# Altium PCB Plane_receiver_pcb.PcbDoc
Units mil, origin at the board's own origin, x right, y up, seen from the top; angles counter-clockwise.
Board outline 2083.66 x 3150.59 mil, 2 copper layers (Top Layer, Bottom Layer); 28 components, 28 nets, 95 pads, 0 vias.
Unrouted connection lines stored in the file: 1.
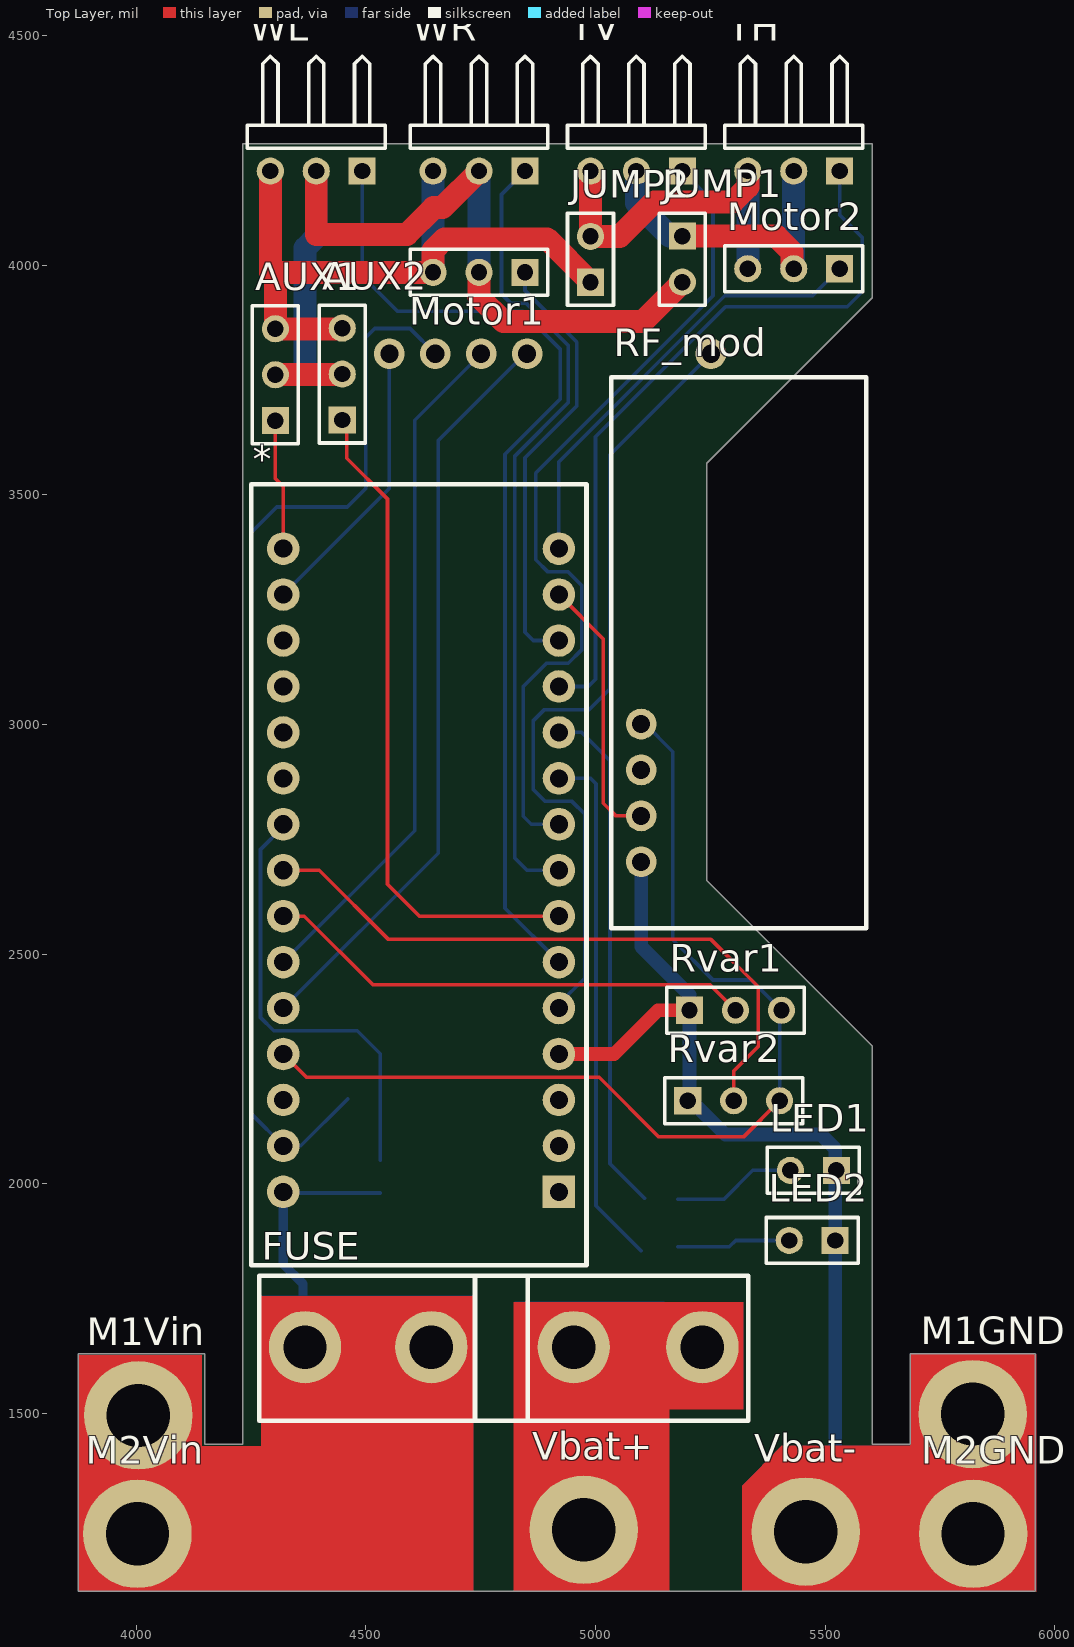
[diagram p0: Top Layer view]
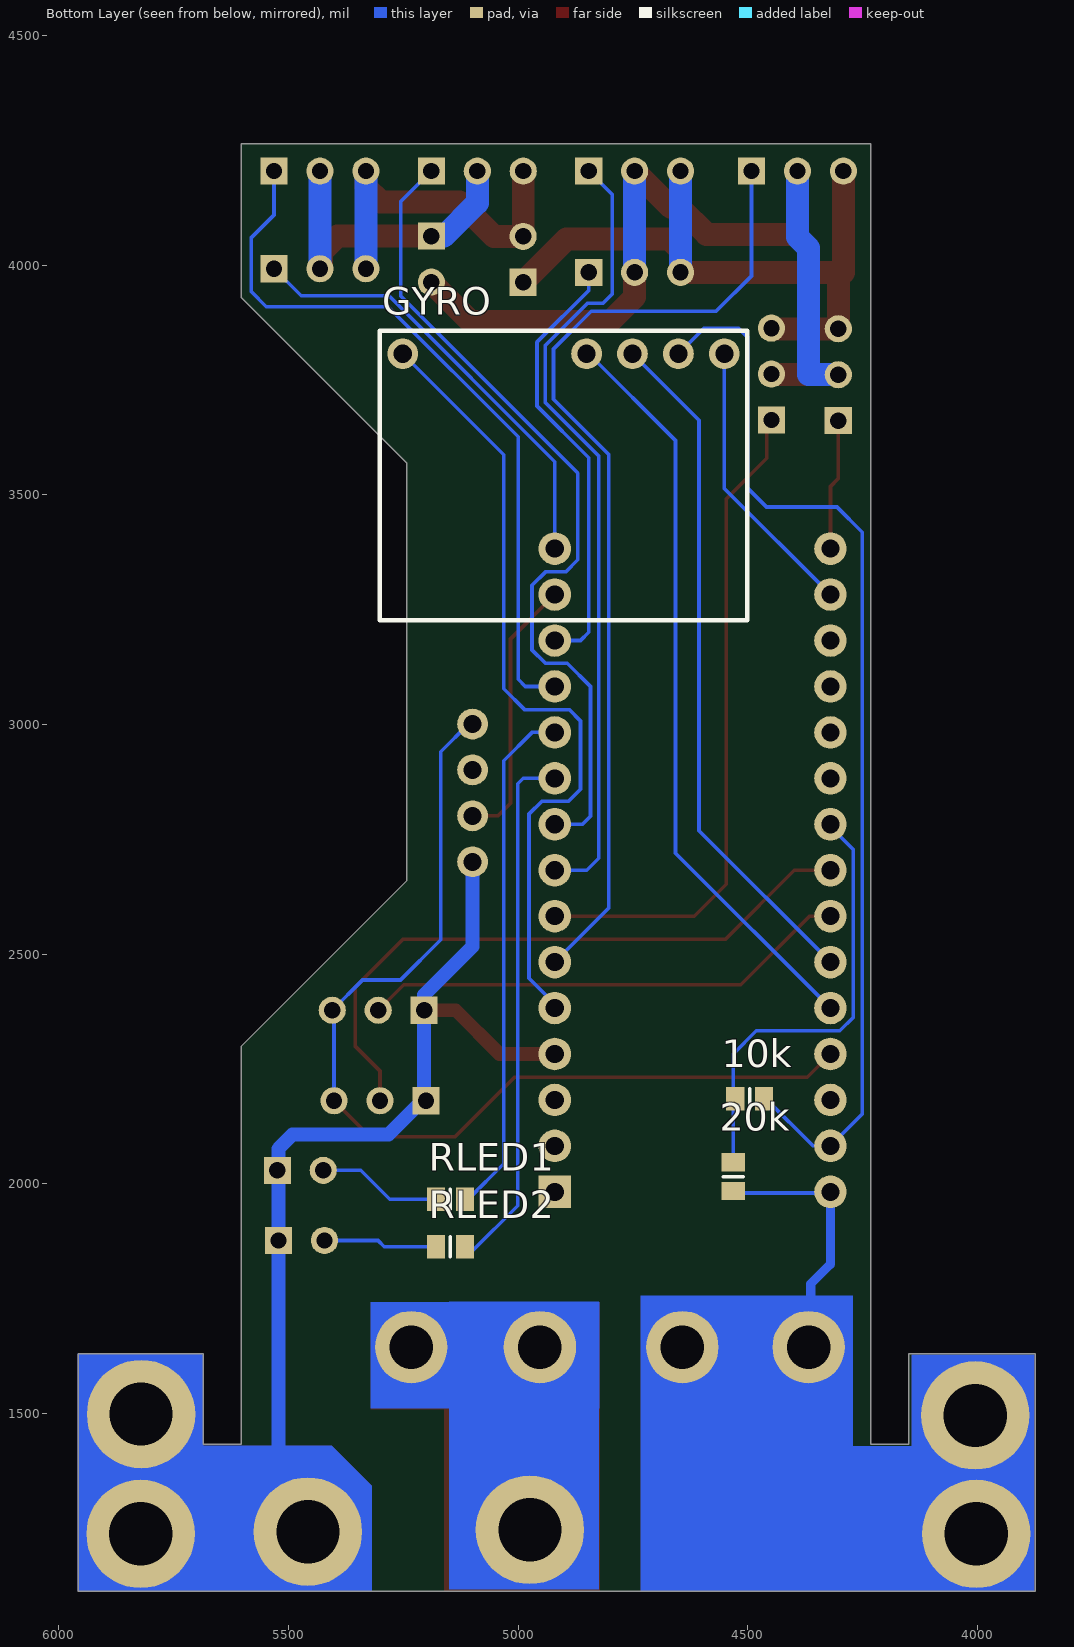
[diagram p1: Bottom Layer view, seen from below]

## Layer stack, top to bottom
Top Layer: signal copper 1.4
Dielectric: dielectric 12.6, FR-4, Dk 4.8
Bottom Layer: signal copper 1.4

## Board outline
4149.61,1433.07 4149.61,1629.92 3874.02,1629.92 3874.02,1113.19 5957.68,1113.19 5957.68,1629.92 5685.04,1629.92 5685.04,1433.07 5602.36,1433.07 5602.36,2300.2 5242.13,2660.43 5242.13,3568.9 5602.36,3929.13 5602.36,4263.78 4232.28,4263.78 4232.28,1433.07

## Design rules (kind name [scope] priority, off if disabled: settings)
Clearance [All] p1: gap=10
Height [All] p1 off: minheight=0 maxheight=1000 prefheight=500
PolygonConnect [All] p1: connectstyle=Relief reliefconductorwidth=10 reliefentries=4 polygonreliefangle="90 Angle" airgapwidth=10
RoutingVias [All] p1: holewidth=28 width=50 viastyle="Through Hole" minholewidth=28 minwidth=50 maxholewidth=28 maxwidth=50
SolderMaskExpansion [All] p1: expansion=4
Width [All] p1: maxlimit=500 minlimit=8 preferedwidth=30
27 further rules are at their usual default settings.

## Components (designator, comment, footprint, x,y, rotation, side; value= is the part's Value field where it differs from the comment)
10k "Res Varistor" 6-0805_L 4496.06,2185.04 r0 bottom
20k "Res Varistor" 6-0805_L 4531.5,2015.75 r270 bottom
* "arduinoNano" "Arduino nano" 4980.31,1822.83 r90 top
AUX1 "Header 3" HDR1X3 4303.15,3661.42 r90 top
AUX2 "Header 3" HDR1X3 4448.82,3662.8 r90 top
FUSE "FUSE_HOLDER" FUSE_HOLDER 5232.72,1644.68 r180 top
GYRO "GYRO" Gyro 4551.18,3807.09 r0 bottom
JUMP1 "Header 2" HDR1X2 5188.98,4062.99 r270 top
JUMP2 "Header 2" HDR1X2 4989.17,3962.6 r90 top
LED1 "Header 2" HDR1X2 5524.21,2029.53 r180 top
LED2 "Header 2" HDR1X2 5521.65,1876.97 r180 top
M1GND "PWR_con1" PWR_CON_1 5820.87,1499.02 r0 top
M1Vin "PWR_con1" PWR_CON_1 4004.92,1496.06 r0 top
M2GND "PWR_con1" PWR_CON_1 5821.85,1238.19 r0 top
M2Vin "PWR_con1" PWR_CON_1 4002.95,1238.19 r0 top
Motor1 "Header 3" HDR1X3 4846.46,3984.25 r180 top
Motor2 "Header 3" HDR1X3 5531.5,3992.13 r180 top
RF_mod "Receiver" RF_modue 5539.37,2681.1 r90 top
RLED1 "Res Varistor" 6-0805_L 5147.64,1966.54 r180 bottom
RLED2 "Res Varistor" 6-0805_L 5147.64,1863.19 r180 bottom
Rvar1 "Pot" HDR1X3 5204.72,2377.95 r0 top
Rvar2 "pot" HDR1X3 5200.79,2181.1 r0 top
TH "Header 3H" HDR1X3H 5531.5,4204.72 r180 top
TV "Header 3H" HDR1X3H 5188.98,4204.72 r180 top
Vbat+ "PWR_con1" PWR_CON_1 4974.41,1247.05 r0 top
Vbat- "PWR_con1" PWR_CON_1 5457.68,1243.11 r0 top
WL "Header 3H" HDR1X3H 4492.13,4204.72 r180 top
WR "Header 3H" HDR1X3H 4846.46,4204.72 r180 top

## Footprints (in the part's own frame and the unit in brackets; to place one, negate y for a bottom-side part, rotate by r counter-clockwise, add the part's x,y. Pads: shape width x height; smd on the part's side, far side on the other; paste and mask are expansions set on the pad)
6-0805_L [mm] "Chip Resistor, Body 2.0x1.2mm, IPC High Density"
  rect 1x1.3 smd: 1(-0.8,0) 2(0.8,0)
  silkscreen extent 0,-0.55 0,0.55, body extent -1.07,-0.7 1.07,0.7, height 0.7
"Arduino nano" [mm] "arduino nano"
  rect 1.8x1.8 hole 1: 0(4.064,1.524)
  round 1.8 hole 1: 1(6.604,1.524) 2(9.144,1.524) 3(11.684,1.524) 4(14.224,1.524) 5(16.764,1.524) 6(19.304,1.524) 7(21.844,1.524) 8(24.384,1.524) 9(26.924,1.524) 10(29.464,1.524) 11(32.004,1.524) 12(34.544,1.524) 13(37.084,1.524) 14(39.624,1.524) 15(39.624,16.764) 16(37.084,16.764) 17(34.544,16.764) 18(32.004,16.764) 19(29.464,16.764) 20(26.924,16.764) 21(24.384,16.764) 22(21.844,16.764) 23(19.304,16.764) 24(16.764,16.764) 25(14.224,16.764) 26(11.684,16.764) 27(9.144,16.764) 28(6.604,16.764) 29(4.064,16.764)
  silkscreen extent 0,0 43.18,18.54
FUSE_HOLDER [mm]
  round 4 hole 2.4: 1(0,0) 1(7.112,0) 2(14.986,0) 2(21.971,0)
  silkscreen extent -2.54,-3.94 24.51,4.06
Gyro [mm]
  round 1.7 hole 1: GND(2.54,0) INT(17.78,0) SCL(5.08,0) SDA(7.62,0) VCC(0,0)
  silkscreen extent -1.27,-1.27 19.05,14.73
HDR1X2 [mm] "Connector; Header; 2 Position"
  rect 1.5x1.5 hole 0.9: 1(0,0)
  round 1.5 hole 0.9: 2(2.54,0)
  silkscreen extent -1.27,-1.27 3.81,1.27
HDR1X3 [mm] "Connector; Header; 3 Position"
  rect 1.5x1.5 hole 0.9: 1(0,0)
  round 1.5 hole 0.9: 2(2.54,0) 3(5.08,0)
  silkscreen extent -1.27,-1.27 6.35,1.27
HDR1X3H [mm] "Connector; Header; 3 Position; Right Angle"
  rect 1.5x1.5 hole 0.9: 1(0,0)
  round 1.5 hole 0.9: 2(2.54,0) 3(5.08,0)
  silkscreen extent -1.27,-6.35 6.35,-1.27
PWR_CON_1 [mm]
  round 6 hole 3.5: 0(0,0)
RF_modue [mm]
  round 1.7 hole 1: DATA1(3.048,11.176) DATA2(5.588,11.176) GND(0.508,11.176) VCC(8.128,11.176)
  silkscreen extent -3.18,-1.27 27.3,12.83

## Part data
10k 20k RLED1 RLED2: "Varistor (Voltage-Sensitive Resistor)"
AUX1 AUX2 Motor1 Motor2: "Header, 3-Pin"
JUMP1 JUMP2 LED1 LED2: "Header, 2-Pin"
Rvar1 Rvar2: library part "Header 3", "Header, 3-Pin"
TH TV WL WR: "Header, 3-Pin, Right Angle"

## Nets (pads, with @x,y where several pads share a name; then routed paths per layer and width w, separated by ;. In a path a pad name is that pad's centre, name@x,y a point inside that pad or via, vN(x,y) a via of type N, cw(c..) or ccw(c..) an arc to the next point about the centre after c; other vN are vias at no path point)
3.3V: *.16 GYRO.VCC | length 619.9
  Bottom Layer w8: *.16 4551.18,3513.7 GYRO.VCC
5VARD: *.26 RF_mod.VCC Rvar1.3 Rvar2.3 | length 2188
  Top Layer w8: *.26 4370.88,2232.27 5007.89,2232.27 5137.8,2102.36 5322.05,2102.36 Rvar2.3
  Bottom Layer w8: RF_mod.VCC 5108.15,3001.1 5168.31,2940.94 5168.31,2531.5 5255.91,2443.9 5338.78,2443.9 Rvar1.3 ; Rvar2.3 Rvar1.3@5400.79,2377.95
5VM1: AUX1.2 AUX2.2 JUMP1.2 Motor1.2 WL.2 WR.2 | length 1979.4
  Top Layer w50: AUX1.2 AUX2.2@4448.82,3761.42 ; WL.2 4392.13,4066.93 4589.57,4066.93 4647.64,4125 4666.73,4125 WR.2 ; Motor1.2 4746.46,3930.71 4800.2,3876.97 5102.95,3876.97 JUMP1.2
  Bottom Layer w50: AUX1.2 4367.72,3761.42 4367.72,4037.01 4392.13,4061.42 WL.2 ; Motor1.2@4746.46,3992.13 WR.2
5VM2: JUMP1.1 Motor2.2 TH.2 TV.2 | length 697.6
  Top Layer w50: JUMP1.1 5393.7,4062.99 5427.56,4029.13 Motor2.2@5427.56,3992.13
  Bottom Layer w50: TV.2 5088.98,4135.43 5161.42,4062.99 JUMP1.1 ; Motor2.2@5431.5,3996.06 TH.2
D4: *.6 AUX2.1 | length 1451.6
  Top Layer w8: AUX2.1@4448.82,3661.42 4458.66,3651.57 4458.66,3579.72 4547.24,3491.14 4547.24,2652.56 4616.97,2582.83 *.6
D13: *.15 AUX1.1 | length 285.7
  Top Layer w8: AUX1.1 4303.15,3535.43 4320.31,3518.27 *.15
GND: 10k.1 *.3 *.28 GYRO.GND LED1.1 LED2.1 M1GND.0 M2GND.0 RF_mod.GND Rvar1.1 Rvar2.1 Vbat-.0 | length 4315
  Top Layer w30: *.3 5040.71,2282.83 5135.83,2377.95 Rvar1.1
  Bottom Layer w8: 10k.1@4460.63,2185.04 4358.43,2082.83 *.28 4250.98,2152.17 4250.98,3418.31 4306.1,3473.43 4459.65,3473.43 4500,3513.78 4500,3842.52 4519.68,3862.2 4596.06,3862.2 GYRO.GND
  Bottom Layer w30: RF_mod.GND 5099.37,2516.77 5204.72,2411.42 Rvar1.1 5204.72,2185.04 5282.48,2107.28 5491.14,2107.28 5521.65,2076.77 LED2.1 5521.65,1353.35
GND1: AUX1.3 AUX2.3 JUMP2.1 Motor1.3 WL.3 WR.3 | length 1481.9
  Top Layer w50: 4292.13,3984.25 WL.3 ; 4303.15,3973.23 AUX1.3 AUX2.3@4448.82,3861.42 ; 4303.15,3984.25 Motor1.3 4646.46,4032.28 4671.26,4057.09 4894.69,4057.09 JUMP2.1
  Bottom Layer w50: Motor1.3 WR.3
GND2: JUMP2.2 Motor2.3 TH.3 TV.3 | length 776.4
  Top Layer w50: TV.3 4988.98,4062.6 JUMP2.2 5052.76,4062.6 5127.95,4137.8 5299.21,4137.8 5331.5,4170.08 TH.3
  Bottom Layer w50: Motor2.3 TH.3
INT: *.4 GYRO.INT | length 1736.5
  Bottom Layer w8: *.4@4920.28,2391.73 4976.38,2447.83 4976.38,2805.12 4948.82,2832.68 4890.75,2832.68 4864.17,2859.25 4864.17,3007.87 4888.78,3032.48 4986.22,3032.48 5031.5,3077.76 5031.5,3587.4 GYRO.INT
LED1: *.10 RLED1.2 | length 1120.8
  Bottom Layer w8: *.10 4969.92,2982.83 5031.5,2921.26 5031.5,2044.09 RLED1.2@5107.09,1968.5
LED2: *.9 RLED2.2 | length 1143
  Bottom Layer w8: *.9 4989.21,2882.83 5000.98,2871.06 5000.98,1952.56 RLED2.2@5099.21,1854.33
Net*_5: *.5 WL.1 | length 2157.8
  Bottom Layer w8: WL.1 4492.13,3976.38 4569.18,3899.32 4841.1,3899.32 4922.94,3817.48 4922.94,3708.24 4803.15,3588.45 4803.15,2600 *.5
Net*_7: *.7 WR.1 | length 1751.8
  Bottom Layer w8: WR.1 4795.28,4153.54 4795.28,3937.01 4814.96,3917.32 4848.56,3917.32 4940.94,3824.94 4940.94,3700.79 4824.52,3584.36 4824.52,2708.95 4850.63,2682.83 *.7
Net*_8: *.8 TV.1 | length 1824.7
  Bottom Layer w8: *.8 4859.88,2782.83 4842.52,2800.2 4842.52,3082.68 4893.24,3133.4 4940.79,3133.4 4969.75,3162.36 4969.75,3303.31 4940.79,3332.27 4896.72,3332.27 4870.08,3358.91 4870.08,3547.24 5255.91,3933.07 5255.91,4137.8 TV.1
Net*_11: *.11 TH.1 | length 1608.6
  Bottom Layer w8: *.11 4984.41,3082.83 5000,3098.43 5000,3626.25 5283.19,3909.45 5548.23,3909.45 5580.71,3941.93 5580.71,4060.04 5531.5,4109.25 TH.1
Net*_12: *.12 Motor1.1 | length 957.9
  Bottom Layer w8: Motor1.1 4846.46,3944.88 4958.94,3832.39 4958.94,3693.33 4846.46,3580.84 4846.46,3200.79 4864.41,3182.83 *.12
Net*_13: *.13 RF_mod.DATA1 | length 588.1
  Top Layer w8: *.13 5016.73,3186.42 5016.73,2828.74 5044.37,2801.1 RF_mod.DATA1
Net*_14: *.14 Motor2.1 | length 974.4
  Bottom Layer w8: *.14 4920.31,3572.02 5281.36,3933.07 5472.44,3933.07 Motor2.1
Net*_21: 10k.2 20k.1 *.21 | length 966.5
  Bottom Layer w8: *.21 4320.31,2777.5 4270.88,2728.07 4270.88,2362.36 4299.84,2333.4 4481.56,2333.4 4531.5,2283.46 20k.1@4531.5,2051.18
Net*_22: *.22 Rvar2.2 | length 1409.3
  Top Layer w8: *.22 4398.86,2682.83 4549.43,2532.27 5251.2,2532.27 5354.33,2429.13 5354.33,2299.21 5300.79,2245.67 Rvar2.2
Net*_23: *.23 Rvar1.2 | length 1069.3
  Top Layer w8: *.23 4365.98,2582.83 4515.42,2433.4 5249.28,2433.4 Rvar1.2
Net*_24: *.24 GYRO.SCL | length 1502.7
  Bottom Layer w8: *.24 4606.3,2768.82 4606.3,3662.2 GYRO.SCL
Net*_25: *.25 GYRO.SDA | length 1646.9
  Bottom Layer w8: *.25 4657.48,2720 4657.48,3618.11 4846.46,3807.09 GYRO.SDA
NetFUSE_1: FUSE.1 Vbat+.0
NetLED1_2: LED1.2 RLED1.1 | length 271.2
  Bottom Layer w8: RLED1.1 5279.53,1966.54 5342.52,2029.53 LED1.2
NetLED2_2: LED2.2 RLED2.1 | length 248.2
  Bottom Layer w8: RLED2.1 5291.34,1863.19 5305.12,1876.97 LED2.2
V_FUSED: 20k.2 *.29 FUSE.2 M1Vin.0 M2Vin.0 | length 622.7
  Bottom Layer w8: *.29@4322.83,1980.31 20k.2@4531.5,1980.31
  Bottom Layer w20: *.29 4320.31,1825.35 4363.35,1782.32 FUSE.2@4363.35,1586.61
pads on no net: *.0 *.1 *.2 *.17 *.18 *.19 *.20 *.27 RF_mod.DATA2

## Other copper
Top Layer:
  rectangle net GND: 5406.5,1112.2 5959.65,1430.12
  rectangle net GND: 5685.04,1111.22 5959.65,1629.92
  rectangle net V_FUSED: 4271.65,1114.17 4734.25,1755.91
  rectangle net V_FUSED: 3875.98,1114.17 4720.47,1429.13
  region net V_FUSED: 4143.7,1125.98 4143.7,1627.95 3874.02,1627.95 3874.02,1125.98
  rectangle net NetFUSE_1: 4821.85,1113.19 5161.42,1743.11
  rectangle net NetFUSE_1: 4822.83,1508.86 5321.85,1743.11
  region net GND: 5476.38,1430.12 5405.51,1430.12 5318.9,1343.5 5318.9,1198.82 5318.9,1112.2 5405.51,1112.2 5476.38,1112.2
Bottom Layer:
  region net V_FUSED: 4143.7,1114.17 4143.7,1628.94 3875.98,1628.94 3875.98,1114.17
  rectangle net V_FUSED: 3875.98,1113.19 4734.25,1429.13
  rectangle net V_FUSED: 4271.65,1118.11 4734.25,1756.89
  rectangle net NetFUSE_1: 4822.83,1510.83 5321.85,1743.11
  rectangle net NetFUSE_1: 4823.82,1117.13 5150.59,1744.09
  rectangle net GND: 5685.04,1113.19 5959.65,1630.91
  rectangle net GND: 5406.5,1112.2 5958.66,1430.12
  region net GND: 5476.38,1430.12 5405.51,1430.12 5318.9,1343.5 5318.9,1112.2 5477.99,1112.2

## Silkscreen, mask and mechanical layers (free items; w line width, h text height)
Mechanical 1:
  lines w10: 3874.02,1113.19 3874.02,1629.92 4149.61,1629.92 4149.61,1433.07 4232.28,1433.07 4232.28,2161.42 4232.28,4263.78 5602.36,4263.78 5602.36,3929.13 5242.13,3568.9 5242.13,2973.43 5242.13,2660.43 5602.36,2300.2 5602.36,2153.54 5602.36,1433.07 5685.04,1433.07 5685.04,1629.92 5957.68,1629.92 5957.68,1113.19 3874.02,1113.19
Mechanical 2:
  text "SS1" at 4444.88,4115.16 h40
  text "SS2" at 4794.29,4115.16 h40
  text "SS4" at 5479.33,4115.16 h40
  text "J12" at 5070.87,3951.77 h40 r45
  text "MG1" at 4589.57,3886.81 h40
  text "MG2" at 5234.25,3862.2 h40 r45
  text "M52" at 5343.5,3848.43 h40 r45
  text "MS2" at 5441.93,3837.6 h40 r45
  text "GND" at 4630.91,3753.94 h40 r270
  text "SDA" at 4831.69,3752.95 h40 r270
  text "SCL" at 4730.31,3751.97 h40 r270
  text "v1.0 - J. Mathault" at 5079.72,3733.27 h40 r270
  text "3V" at 4516.73,3713.58 h40
  text "Plane_Receiver" at 5169.29,3662.4 h40 r270
  text "AS1" at 4503.94,3634.84 h40
  text "AS2" at 4350.39,3594.49 h40 r270
  text "M2S" at 4736.22,3363.19 h40
  text "AS2" at 4394.69,3359.25 h40
  text "3V" at 4393.7,3265.75 h40
  text "RFC" at 4736.22,3265.75 h40
  text "M1S" at 4738.19,3168.31 h40
  text "VR1" at 4388.78,3109.25 h40
  text "SS4" at 4734.25,3060.04 h40
  text "VR2" at 4373.03,3010.83 h40
  text "5V" at 5155.51,2980.32 h40
  text "LED1" at 4698.82,2960.63 h40
  text "SCLDA" at 4376.97,2899.61 h40 r270
  text "D1" at 5161.42,2880.91 h40
  text "LED2" at 4681.1,2864.17 h40
  text "D1" at 5161.42,2779.53 h40
  text "SS3" at 4719.49,2768.7 h40
  text "GND" at 5164.37,2722.44 h40 r270
  text "SS2" at 4718.5,2671.26 h40
  text "AS1" at 4724.41,2606.3 h40
  text "SS1" at 4724.41,2464.57 h40
  text "INT" at 4726.38,2357.28 h40
  text "VBAT" at 4383.86,2355.32 h40
  text "GND" at 4716.54,2262.8 h40
  text "5V" at 4412.4,2259.84 h40
  text "GND" at 4418.31,2066.93 h40
  text "-" at 5608.27,2020.67 h40 r90
  text "+" at 5333.66,2009.84 h40
  text "Vin" at 4419.29,1967.52 h40
  text "LED1" at 5410.43,1937.01 h40
  text "-" at 5605.31,1868.11 h40 r90
  text "+" at 5329.72,1856.3 h40
  text "LED2" at 5404.53,1765.75 h40